# Altium PCB roneCPUBoard-v11.PcbDoc (part 2 of 3)
Units mil, origin at the board's own origin, x right, y up, seen from the top; angles counter-clockwise.
Board outline 3915.41 x 3915.49 mil, 2 copper layers (Top Layer, Bottom Layer); 202 components, 158 nets, 750 pads, 439 vias.
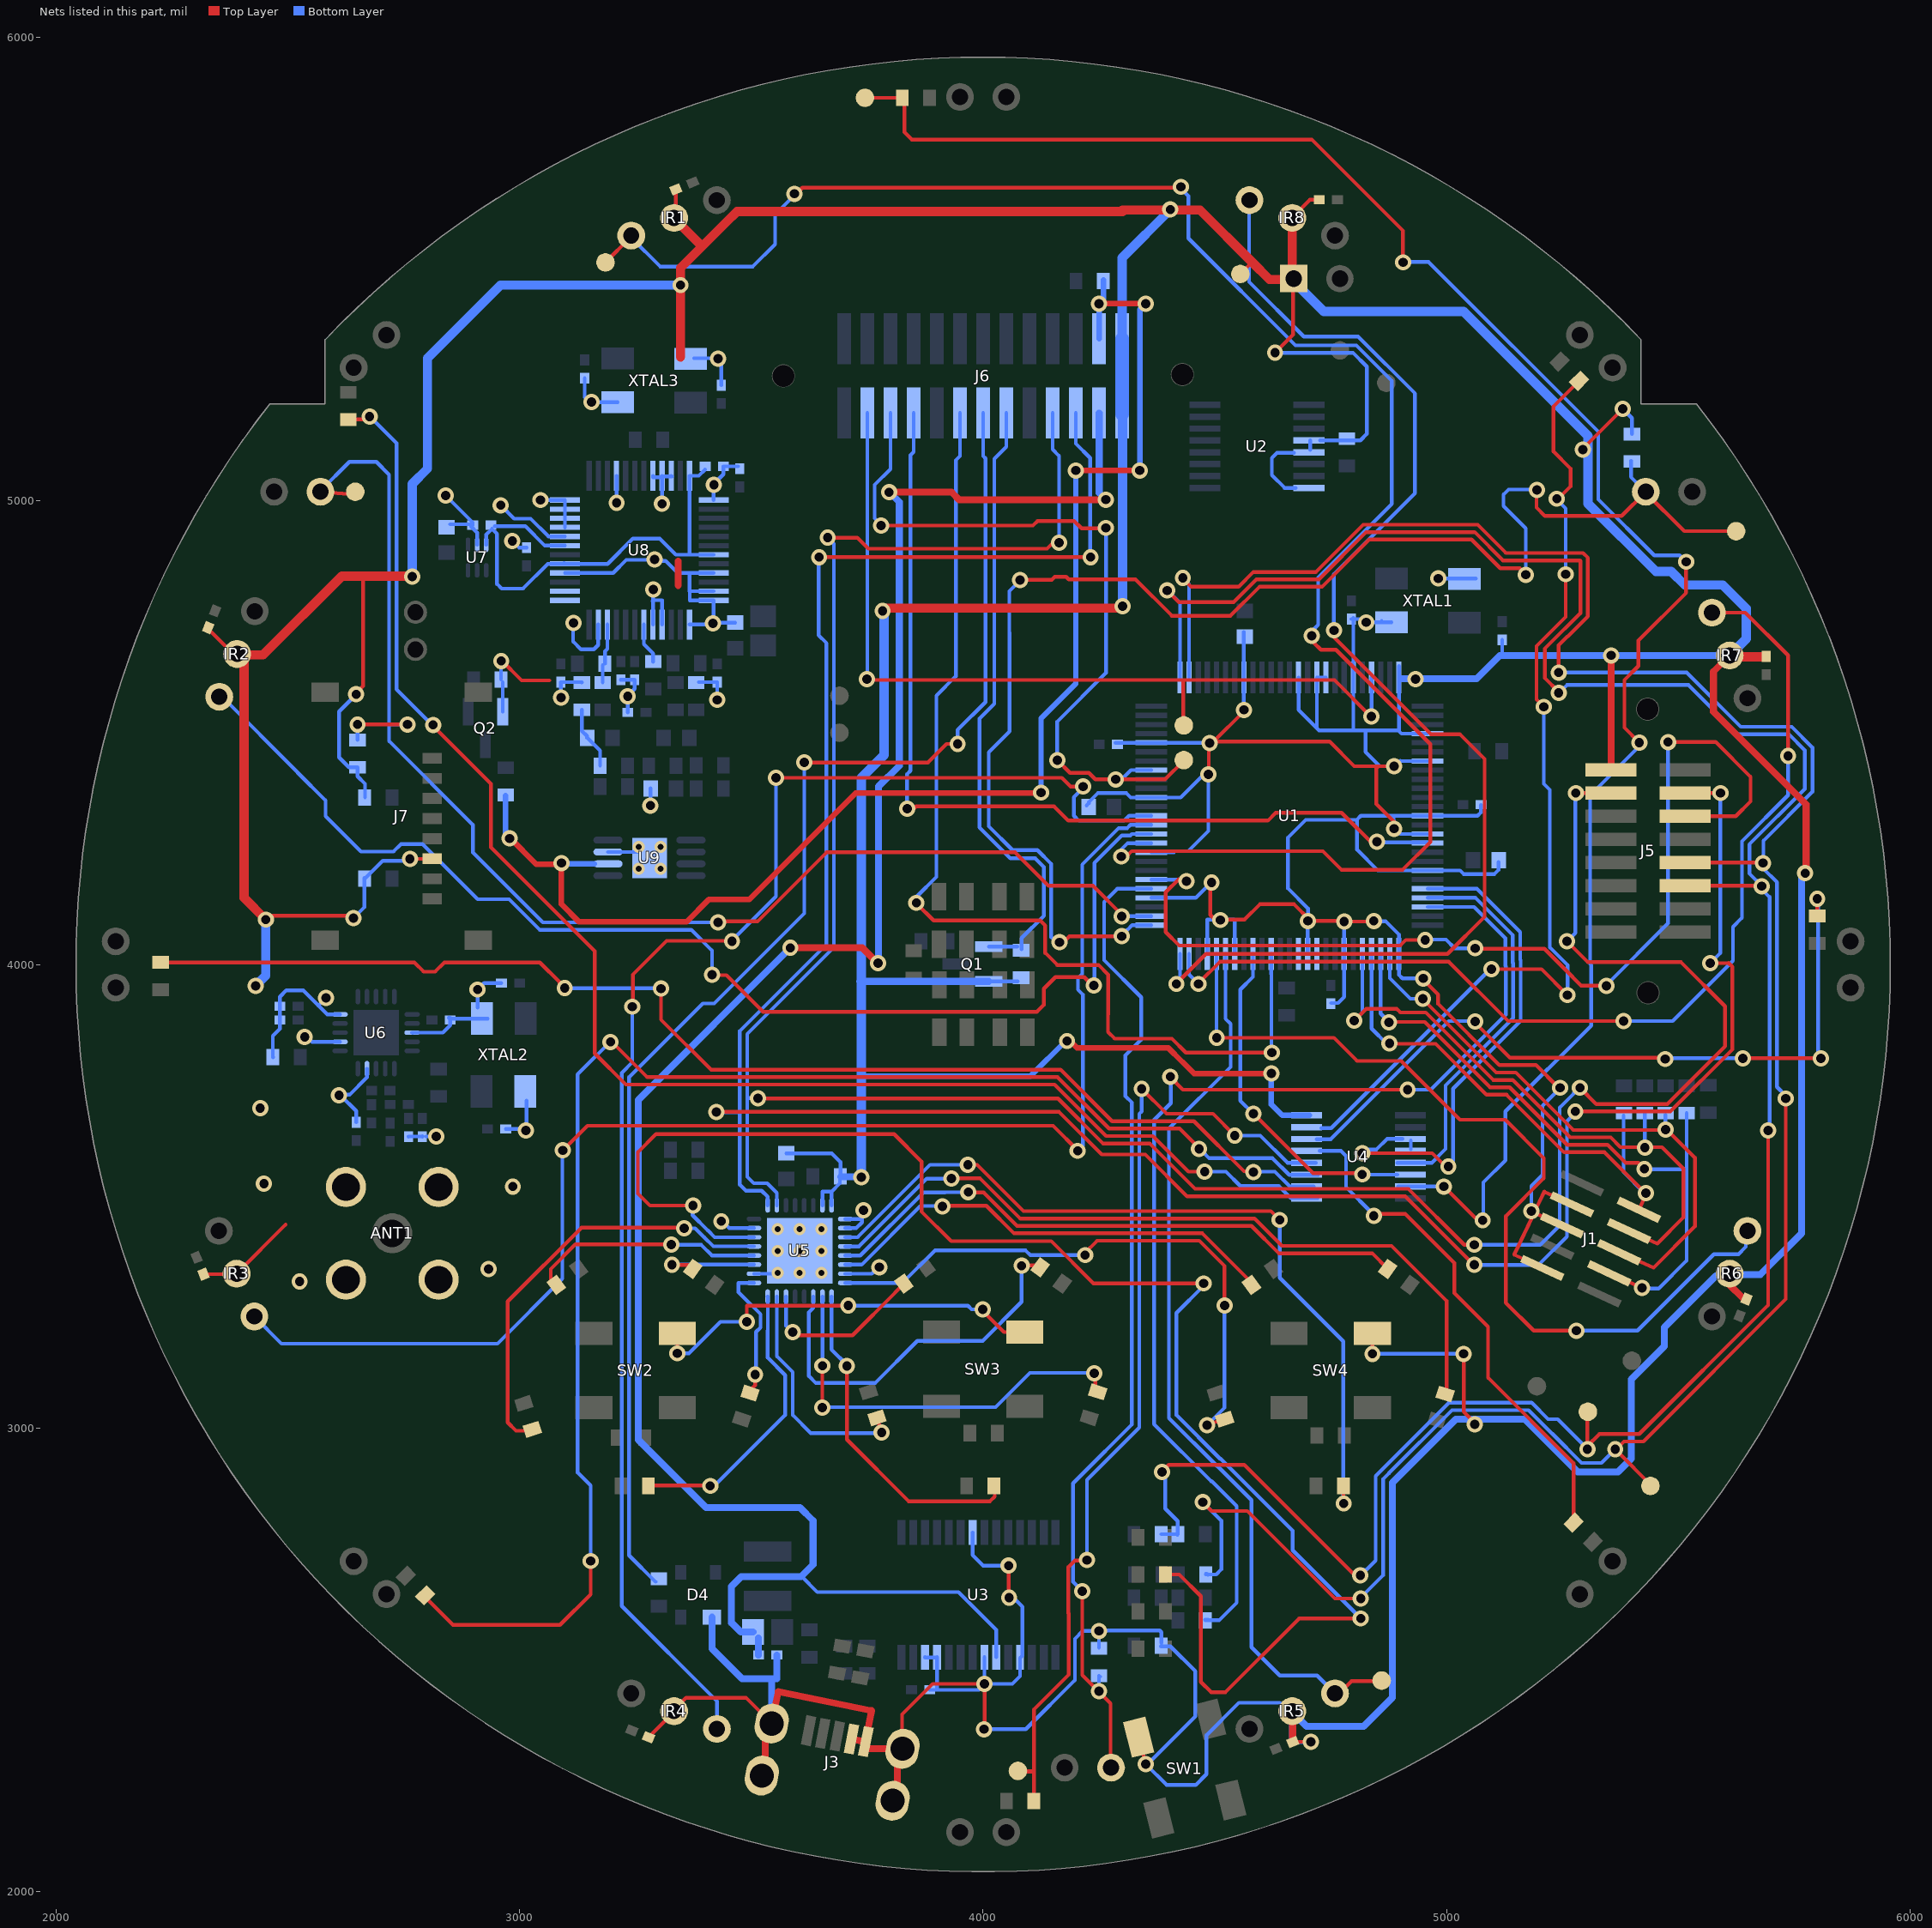
[diagram p2: the nets of this part, all layers, seen from the top]

## Via types
v1: diameter 35, hole 20, Top Layer to Bottom Layer, 418 vias
v2: diameter 25.98, hole 12.99, Top Layer to Bottom Layer, tented top, 17 vias
v3: diameter 149, hole 129, Top Layer to Bottom Layer, 2 vias
v4: diameter 260, hole 129, Top Layer to Bottom Layer, 2 vias

## Nets (pads, with @x,y where several pads share a name; then routed paths per layer and width w, separated by ;. In a path a pad name is that pad's centre, name@x,y a point inside that pad or via, vN(x,y) a via of type N, cw(c..) or ccw(c..) an arc to the next point about the centre after c; other vN are vias at no path point) (continued)
5V_BOOST: J6.23 R12.1 R56.2 U9.6 | length 3016.1
  Top Layer w12: v1@2978,4274 3036,4216 3090,4216 3090,4130 3128,4092 3359.7,4092 3407.7,4140 3495,4140 3725,4370 v1@4135,4370 ; v1(4200,5066) v1(4338,5066) ; v1(4250,5426) v1(4351,5426)
  Bottom Layer w12: R56.2@2969,4364 2969,4281 v1(2978,4272) ; v1@3090,4216 3089,4217 U9.6@3160.51,4217 ; v1@4125,4383 4125,4531 4200,4606 v1(4200,5066) ; J6.23@4250,5350.02 v1(4250,5426) 4260,5436 R12.1@4260,5477 ; v1(4338,5066) 4338,5413 v1(4351,5426)
  other v1: 3090,4219 4125,4371
5VUSB: C9.2 J6.24 L1.2 U3.20 | length 4554.1
  Top Layer w15: v1@3575,4036 3739,4036 v1@3772,4003 ; v1(3797,5019) 3932,5019 3948.5,5002.5 v1@4255,5002.5
  Bottom Layer w8: 3607,2681 3608,2680 3642,2646 3947,2646 4028.39,2564.61 U3.20@4028.39,2505.55
  Bottom Layer w15: 3457,2579 3457,2580 ; L1.2@3503.5,2560 3477,2560 3457,2580 ; C9.2@3515.31,2510 L1.2@3515.31,2546.69 ; v1@3574,4037 3575,4036 v1(3584,4036) 3256,3708 3256,2974.33 3402.33,2828 3605,2828 3633,2800 3633,2705 3608,2680 3607,2679 3478,2679 3457,2658 3457,2580 ; v1@3774,4002 3774,4384 3819,4429 3819,4998 v1@3797,5020 ; J6.24@4250,5189.98 4250.5,5189.48 4250.5,5017.5 v1@4260,5008
  other v1: 3773,4003 4265,5003
ADC_EXPAND: J5.11 U1.6 | length 2206.7
  Top Layer w8: 4421.91,4184 4394,4156.09 4394,4070 4423,4041 4900,4041 4912,4053 4953,4053 4954,4054 v1(4954,4053) ; v1@5064,4034 5211.37,4034 5272.37,3973 5272.37,3972.63 5290.5,3954.5 v1@5345,3954.5 ; v1(5478,4480) 5580.9,4480 5656,4404.9 5656,4352 5624,4320 J5.11@5515.02,4320
  Bottom Layer w8: U1.6@4362.77,4183.2 v1@4433.2,4183.2 ; v1@4433.41,4183 v1@4440,4183 ; v1@4956,4054 4999,4054 5018,4035 v1(5062,4035) ; v1@5344,3954 5344,3955 5478,4089 v1(5478,4480)
  other v1: 5345,3954 4439,4180
CHRG: J6.14 R17.1 | length 3054.5
  Top Layer w8: v1@3612,4436 3881,4436 3921,4476 v1(3945,4476)
  Bottom Layer w8: R17.1@3293,2668 3236,2725 3236,3757 3395,3916 3419.63,3916 3614,4110.37 3614,4435 v1@3615,4436 ; v1@3945,4475 3945,4506.25 4005,4566.25 4005,5092 4000,5097 J6.14@4000,5189.98
  other v1: 3614,4436
CHRGEN: J6.12 U1.90 | length 2321
  Top Layer w8: v1@3851,4130 3858,4130 3893,4095 4123,4095 4134,4084 4134,4025 4160,3999 4249,3999 4270,3978 4270,3892.72 4269.5,3892.22 4269.5,3854.5 4284,3840 4407.28,3840 4437.28,3810 v1(4623,3810)
  Bottom Layer w8: v1@3857,4133 3857,4147 3899,4189 3899,4580 3941,4622 3941,5088 3950,5097 J6.12@3950,5189.98 ; U1.90@4621.63,4022.77 4621.63,3979.62 4622,3979.25 4622,3811 v1(4623,3810)
  other v1: 3856,4133
CVDD: C31.2 C32.2 U7.3 U8.5 U8.7 U8.24 U8.31 | length 1072.9
  Bottom Layer w8: U7.3@2927.69,4905.56 2927.69,4927.69 2940,4940 2951,4929 2951,4821 2961,4811 3007,4811 3060.47,4864.47 U8.5@3097.57,4864.47 ; C32.2@2946,4946 3012,4946 3054.16,4903.84 U8.7@3097.57,4903.84 ; U8.5@3095.79,4866.25 U8.5@3097.57,4864.47 ; 3366.27,4886.27 U8.24@3366.27,5054.43 3386.43,5054.43 C31.2@3400,5068 ; U8.31@3418.43,4884.16 3336.84,4884.16 3302,4919 3244,4919 3189.47,4864.47 U8.5@3097.57,4864.47
DREQ: U8.8 | length 166.5
  Bottom Layer w8: v1(2959,4991) 2988,4962 3023.62,4962 3062.09,4923.53 U8.8@3097.57,4923.53
FTDI_RX: D31.2 J5.5 R61.2 TP6.1 U1.26 | length 5677.2
  Top Layer w8: v1@4386,2899 4386,2906 4400.5,2920.5 4563.5,2920.5 4802,2682 v1(4814,2682) ; v1(4397,4807) 4422,4782 4540.75,4782 4589.75,4831 4724.75,4831 4826.75,4933 5060.63,4933 5121.63,4872 5287.86,4872 ; v1@5242,4588.28 5212,4618.28 5212,4681.63 5254.38,4724.01 ; 5254.87,4724.01 5289,4758.14 5289,4870.86 ; v1(5304,2954) v1@5304,2961 ; TP6.1@5304,3041 v1@5304,2961 ; J5.5@5515.02,4170 v1@5680,4170 ; v1(5694,3642) 5694,3265 5416,2987 5330,2987 v1@5304,2961
  Bottom Layer w8: D31.2@4384.53,2771 R61.2@4416,2771 ; v1(4386,2905) 4386,2899 4393,2899 4393,2826 4420,2799 R61.2@4420,2771 ; v1@4398,4807 4424.78,4780.22 U1.26@4424.78,4619.23 ; R61.2@4419,2770 R61.2@4419.24,2769.76 ; v1(4814,2682) 4802,2682 4814,2694 4827,2694 4847,2714 4847,2896.2 4859,2908.2 4859,2908.37 5005.13,3054.5 5183.7,3054.5 5219.2,3019 5240,3019 5304,2955 v1(5304,2954) ; v1@5243,4586 5260,4603 5522.37,4603 5628.37,4497 5738.26,4497 5773,4462.26 5773,4378.63 5653.5,4259.13 5653.5,4196.5 v1@5680.5,4169.5 ; v1@5680,4162.72 5697,4145.72 v1@5697,3642
  other v1: 5680,4169 5242,4586
FTDI_TX: D30.1 J5.7 TP7.1 U1.27 | length 5641.1
  Top Layer w8: v1@4431,4833 4449,4815 4551.12,4815 4583.12,4847 4718.12,4847 4820.12,4949 5067.25,4949 5128.25,4888 5294.49,4888 5305,4877.49 5305,4751.51 5261.5,4708.01 5261.01,4708.01 5242,4689 v1(5242,4630) ; v1(4474,2840) 4493,2821 4570,2821 4759,2632 v1@4809,2632 ; v1(5364,2954) v1@5365,2953 ; TP7.1@5446,2872 v1@5365,2953 ; J5.7@5515.02,4220 5682,4220 v1(5683,4219) ; v1(5732,3711) 5732,3278 5425,2971 5383,2971 v1@5365,2953
  Bottom Layer w8: v1(4431,4834) 4444.46,4820.54 U1.27@4444.46,4619.23 ; v1(4474,2840) 4514,2800 4514,2695 4503,2684 D30.1@4484,2684 ; D30.1@4480.53,2685 D30.1@4480.53,2684 D30.1@4484,2684 ; D30.1@4483,2685 D30.1@4484,2684 ; D30.1@4485,2683 D30.1@4484,2684 ; v1@4813,2632 4863,2682 4863,2889.58 4875,2901.58 4875,2901.75 5011.75,3038.5 5177.08,3038.5 5227.58,2988 5228,2988 5291.5,2924.5 5334.5,2924.5 v1(5364,2954) ; v1(5242,4630) 5518,4630 5635,4513 5744.89,4513 5790,4467.89 5790,4373 5684,4267 v1@5684,4219 ; v1(5683,4219) 5683,4207.72 5713,4177.72 5713,3736 5732,3717 v1(5732,3711)
  other v1: 4815,2632
GBUF: R47.1 U8.42 | length 88.4
  Bottom Layer w8: U8.42@3267.84,4733.57 3267.84,4691.16 3288,4671 R47.1@3288,4653.53
GND: ANT1.2 ANT1.3 ANT1.4 ANT1.5 C1.1 C2.1 C3.1 C4.1 C5.1 C6.1 C7.1 C8.1 C9.1 C10.1 C11.1 C12.1 C13.1 C14.1 C15.1 C16.1 C17.1 C18.1 C19.1 C21.1 C23.1 C24.1 C25.1 C26.1 C27.1 C28.1 C29.1 C30.2 C31.1 C32.1 C33.2 C34.1 C36.1 C37.1 C38.2 C39.2 C40.2 C41.2 C42.1 C43.2 C46.1 D4.1 IR1.2 IR2.2 IR3.2 IR4.2 IR5.2 IR6.2 IR7.2 IR8.2 J1.3 J1.5 J1.9 J3.4 J3.5 J3.6 J3.7 J3.8 J3.9 J4.1 J5.16 J6.25 J6.26 J7.6 Q1.2 Q2.2 R2.1 R3.1 R10.1 R18.1 R32.1 R33.1 R39.2 R40.2 R41.2 R43.1 R54.1 R55.1 R57.1 SW1.2 SW2.2 SW3.2 SW4.2 TP1.1 U1.4 U1.9 U1.15 U1.21 U1.33 U1.39 U1.41 U1.42 U1.45 U1.50 U1.54 U1.57 U1.63 U1.65 U1.69 U1.76 U1.82 U1.85 U1.86 U1.87 U1.94 U1.97 U2.4 U2.5 U2.8 U3.7 U3.18 U3.21 U3.25 U3.26 U4.8 U5.1 U5.2 U5.7 U5.18 U5.23 U5.31 U5.32 U5.33 U6.8 U6.14 U6.17 U6.20 U7.2 U8.4 U8.9 U8.10 U8.11 U8.12 U8.16 U8.20 U8.21 U8.22 U8.25 U8.33 U8.35 U8.36 U8.37 U8.40 U8.41 U8.47 U9.7 U9.9 XTAL1.2 XTAL1.4 XTAL2.2 XTAL2.4 XTAL3.2 XTAL3.4 | length 32765.1
  Top Layer w8: C13.1@2317.53,3331.81 IR3.2@2385.81,3331.81 ; C12.1@2327.47,4724.53 2382,4670 2385.27,4670.73 2389,4667 2389.5,4668.5 IR2.2@2390,4670 ; IR3.2@2389,3333 2495,3439 ; v1@2459,4105 v1@2640,4105 ; v1(2641,4100) v1@2642,4099 ; v1@2646,4585 2662,4601 2662,4838 2662,4840 ; v1(2647,4583) v1@2655,4591 ; v1(2763,4228) J7.6@2815,4228 ; v1@2960,4661 2960,4657 3004,4613 3064,4613 ; C14.1@3278.19,2332.47 IR4.2@3330,2384.28 ; IR4.2@3331,2390 3359,2418 3488.07,2418 J3.6@3543.89,2362.17 ; IR1.2@3336.81,5613.81 C11.1@3336.81,5672.47 ; v1(3340,3161) SW2.2@3340,3198 ; v1@3432.28,3451 3437.28,3446 v1(3435,3446) ; v1(3490,3229) 3481,3229 3490,3238 3490,3264 v1(3709,3264) ; J3.4@3715.93,2329.04 J3.4@3715.93,2347 ; J3.9@3825,2314 3825,2382 3891,2448 v1(4003,2448) ; v1@3995,3257 4045,3207 SW3.2@4090,3207 SW3.2@4092,3207 ; v1(4002,2350) 4003,2350 v1@4003,2445 ; v1(4055,2703) 4055,2635 v1(4056,2634) ; SW1.2@4335.6,2332.97 v1(4351,2275) ; v1@4487,4406 v1@4487,4480 ; v1@4488,4478 v1(4489,4478) 4494,4478 v1@4497,4481 ; v1(4493,4177) 4492,4177 4490,4175 4490,4107 v1@4503,4094 ; v1(4512,4096) 4513,4097 4564,4097 4597,4130 4671,4130 v1@4705,4096 ; TP1.1@4555,5490 4580.5,5515.5 4581,5516 ; v1(4562.57,4549.43) 4562.57,4546.57 v1@4497,4481 ; v1(4630,5320) 4669,5359 4669,5479 J4.1@4669,5481 ; C15.1@4662,2323 v1(4707,2323) ; IR8.2@4667,5612 4705,5650 C17.1@4725.32,5650 ; v1@4702,4094 4778,4094 v1(4779.11,4092.89) v1@4844.11,4092.89 ; v1(4840,3160) SW4.2@4840,3204 ; v1@4887,4298 4887,4308 4848.5,4346.5 4848.5,4423.5 4853,4428 ; v1@4887,4422 v1(4887,4428) 4853,4428 ; v1(4950,3970) 4947,3970 4982,3935 4982,3914.88 5113.88,3783 5193,3783 5242,3734 v1(5245,3734) v1@5246.36,3734 ; v1(5037,3160) 5037,3035 v1@5061,3011 ; v1(5183,3468) 5183,3473 v1@5189.98,3466.02 ; v1@5190,3464 J1.5@5249.27,3436.78 ; v1@5191,3465 v1@5189.98,3466.02 ; J1.9@5206.68,3345.44 5206.29,3345.62 5146,3374 5189.2,3464.38 5189.45,3464.92 v1@5189.98,3466.02 ; J1.3@5270.57,3482.46 5211,3510 v1@5189.98,3466.02 ; v1(5294,5111) 5293,5112 v1(5380,5199) ; v1@4497,4481 4747.72,4481 4800.72,4428 4853,4428
  Top Layer w12: v1@4188,3835 4202.5,3820.5 4399.2,3820.5 4429.2,3790.5 4429.5,3790.5 4455,3765 v1(4622,3765)
  Top Layer w15: 3342,4818 3342,4870 ; J3.7@3522.3,2250.06 J3.7@3523,2250.06 ; J3.6@3523,2341.28 3530,2348.28 3530,2239 J3.7@3533.5,2235.5 ; J3.6@3545,2369 3558,2431 3759,2390 J3.5@3746.86,2328.09 ; J3.4@3715.93,2329.04 J3.5@3744,2323 ; J3.5@3746.75,2322.51 J3.5@3746.86,2323.09 3746.86,2307.83 J3.9@3815,2307.83 ; J3.8@3805,2195.71 J3.8@3804.52,2195.71 3815,2206.2 J3.9@3815,2307.83 ; J3.9@3826.11,2307.83 J3.9@3815,2307.83 ; 4301,5625 4301,5628 ; C15.1@4668,2329 IR5.2@4668,2390 ; J5.16@5354.98,4420 v1(5355,4667) ; IR7.2@5608,4664 5576,4632 5576,4545.53 5776,4345.53 v1@5776,4191 ; IR6.2@5611,3333 5611,3309 5639,3281 C16.1@5646,3281
  Top Layer w20: IR2.2@2391,4668 2446,4668 2616,4838 2662,4838 v1@2768,4838 ; IR2.2@2405,4668 2405,4144 v1(2452,4097) ; IR1.2@3333,5610 3390,5553 ; 3347,5311 v1(3347,5466) 3347,5503 3445.27,5601.27 3469,5625 4301,5625 ; v1(3783,4763) 3789,4769 4291,4769 v1@4300,4778 ; 4301,5628 4468,5628 4580.5,5515.5 4618,5478 J4.1@4667,5478 ; IR8.2@4655,5611 IR8.2@4667,5611 J4.1@4667,5478 ; J4.1@4670,5480 4669,5479 4667,5477 J4.1@4667,5478 ; IR7.2@5608,4664 C18.1@5682,4664
  Bottom Layer w8: IR3.2@2385.81,3331.81 2386.59,3332.1 IR3.2@2389,3333 ; R43.1@2467.47,3800 2467,3803 2467,3846 2482.31,3861.31 C28.1@2482.31,3880 C21.1@2482.31,3910 2482.31,3930.31 2496,3944 2533,3944 2566,3911 ; v1(2536,3844) 2539,3846 2551.68,3833.32 U6.17@2612.24,3833.32 ; v1(2582,3928) 2566,3912 2566,3911 ; v1(2610,3718) 2626,3718 2627,3719 2632.69,3719 2670.31,3756.62 U6.14@2670.31,3775.24 ; U6.20@2612.24,3892.37 2584.63,3892.37 2566,3911 ; v1@2614,3717 2647,3684 C23.1@2647,3659.69 ; v1(2641,4100) 2665,4124 R2.1@2665,4187 ; v1(2647,4583) 2610,4546 2610,4447 2631.53,4425.47 R39.2@2650,4425.47 2650,4406 2666,4390 R3.1@2666,4361 ; R2.1@2665.47,4185 2704.47,4224 2756,4224 v1@2760,4228 ; C24.1@2760,3628.32 2760,3629 2789,3629 2790,3630 C25.1@2790,3628.32 ; U6.8@2768.76,3852 U6.8@2767.76,3853 2834,3853 2850,3869 C29.1@2850,3885 ; C25.1@2798,3629 v1(2820,3629) ; v1(2840,5012) 2898.32,4953.68 C32.1@2898.32,4948.68 ; C29.1@2846.68,3885 2851.68,3883 XTAL2.4@2931,3883 ; C30.2@2850,4950 2897,4950 C32.1@2898.32,4948.68 ; U7.2@2908,4905.56 2908,4932 2895.16,4944.84 C32.1@2898.32,4948 C32.1@2898.32,4948.68 ; XTAL2.4@2909,3907 v1(2909,3946) 2923,3960 C26.1@2960.31,3960 ; R57.1@2959.53,4615 v1@2959.53,4650.53 ; Q2.2@2963.4,4545.43 R57.1@2963.4,4608.6 ; C27.1@2969.68,3645 v1@3008,3645 ; v1(2984,4914) 2998.31,4899.69 C37.1@3015,4899.69 ; v1@3014.74,3654.74 XTAL2.2@3014.74,3706.26 ; v1(3044.73,5002.27) U8.12@3097.57,5002.27 U8.9@3097.57,4943.21 ; v1(3089,4576) C38.2@3089,4609.31 3132.69,4609.31 R54.1@3134,4608.53 ; U8.4@3097.57,4844.79 3201.79,4844.79 3230,4873 3289,4873 v1(3291,4874) 3292.5,4871 3314.72,4871 3340.72,4845 3366.27,4845 3366.27,4844.79 ; v1@3115,4738 3115,4697 3132,4680 3160,4680 3169.42,4689.42 U8.47@3169.42,4733.57 ; C43.2@3140,5265.31 3140,5224 3147,5217 v1@3155,5217 ; v1@3155.74,5213.26 XTAL3.2@3211.26,5213.26 ; U9.7@3190.43,4242.8 U9.9@3254,4242.8 ; U8.16@3208.79,5054.43 3208.79,4999.21 3209,4999 v1(3209,4996) ; C42.1@3218,4614.32 C34.1@3246.69,4614.32 ; C40.2@3233.31,4544 3233.31,4573.69 v1(3233,4579) 3233,4580 3248,4595 C34.1@3248,4614.32 ; v1@3279,4342 v1@3282,4345 ; v1@3282,4346 v1@3282,4345 ; C46.1@3282.44,4380 3282.44,4345.44 v1@3282,4345 ; U8.41@3287.53,4733.57 3287.53,4783.73 ; U8.20@3287.53,5054.43 3288,5051 3307,5051 3307,5054.43 U8.21@3307.21,5054.43 ; v1(3288,4809) 3287.53,4804.47 3287.53,4789 3287,4783.73 3287.53,4783.73 ; v1(3307,4994) 3307.21,4994 U8.21@3307.21,5054.43 ; U8.40@3307.21,4733.57 3307.21,4785.79 3307,4786 3287.53,4786 3287.53,4783.73 ; U8.22@3326.9,5054.43 3328.68,5053 3308.65,5053 U8.21@3307.21,5054.43 ; v1@3342,3161 3365,3161 3433,3229 v1(3490,3229) ; U8.37@3366.27,4733.57 3415.57,4733.57 3418,4737 3418,4737.56 C33.2@3465,4737.56 ; XTAL3.4@3376,5308 3428,5308 3428,5301 3435,5294 C41.2@3435,5249.69 ; R55.1@3386.31,4609.31 C39.2@3426,4609.31 v1(3426,4571) ; v1(3417,4736.13) 3418.43,4737.57 U8.36@3418.43,4785.73 3366.73,4785.73 3366.73,4805.42 ; U8.35@3418.43,4805.42 3366.73,4805.42 ; U8.33@3418.43,4844.79 3366.27,4844.79 ; U8.25@3418.43,5002.27 3418.43,5028.43 v1(3419,5035) 3419,5037 3439.69,5057.69 C31.1@3439.69,5075 C36.1@3471,5075 ; v1(3435,3446) 3437.28,3446 3452.07,3431.21 U5.23@3505.57,3431.21 ; U5.18@3505.57,3332.79 U5.33@3555.79,3332.79 ; C19.1@3575,3592.56 3673.44,3592.56 3692,3574 R33.1@3692,3547 ; U5.31@3653.21,3480.43 3653.21,3510.21 3673.21,3510.21 ; U5.32@3673,3480.43 3673,3510 3673.21,3510.21 ; 3673.79,3510.21 3673.21,3510.21 ; R33.1@3691,3543 3691,3528 3673.21,3510.21 ; U5.7@3702.43,3332.79 3759.79,3332.79 3774,3347 v1(3776,3347) ; U5.2@3702.43,3431.21 3726.07,3431.21 3738.43,3443.57 3738.43,3467.43 v1@3744,3473 ; U5.1@3702.43,3450.9 3737.9,3450.9 ; v1(3709,3264) 3967,3264 3975,3256 v1(3999,3256) ; U3.26@3874.84,2505.55 3874.84,2505 U3.25@3900.43,2505 ; C10.1@3884.69,2435 3991,2435 4004,2448 4063,2448 4079.57,2464.57 4079.57,2503.57 4084.5,2508.5 4084.5,2537.49 4085,2537.99 4085,2614 4068,2631 4061,2631 4058,2634 v1(4056,2634) ; U3.25@3900.43,2505.55 U3.25@3900.43,2505 ; 3901,2435 3900.43,2435.57 U3.25@3900.43,2505 ; U3.7@3977.2,2774.45 3977.2,2725.8 4000,2703 v1(4055,2703) ; v1(4002,2350) 4092,2350 4198,2456 4198,2545 4215,2562 v1(4250,2562) ; v1@4002.8,2435 U3.21@4002.8,2505.55 ; Q1.2@4012.43,3963.6 R32.1@4074.6,3963.6 ; C7.1@4223,4343 4228,4348 4228,4350.28 4247.44,4369.72 4309.28,4369.72 4318.63,4360.37 4426.37,4360.37 4474,4408 v1@4484,4408 ; R41.2@4250,2526 v1(4250,2562) ; C1.1@4285.52,4478.48 4446.52,4478.48 ; U1.4@4362.77,4143.83 4451.17,4143.83 ; U1.9@4362.77,4242.26 4412.01,4242.26 ; R18.1@4384,2529 4404,2529 4458,2475 4458,2378 4355,2275 v1(4351,2275) 4396,2230 4459,2230 4482,2253 4482,2337 4552,2407 4640,2407 4658,2389 IR5.2@4667,2389 4667.93,2388.36 4668.19,2388.19 IR5.2@4668.19,2385.81 ; R18.1@4384.53,2536.47 4384.53,2559.47 4381,2563 4250,2563 v1(4250,2562) ; 4414.25,4244.5 4442.5,4244.5 4486,4288 v1@4486,4408 ; 4447,4478 v1(4489,4478) ; 4453,4144 4459,4144 4492,4177 v1(4493,4177) ; U1.97@4483.83,4022.77 4483.83,4097 v1@4513,4097 ; v1(4512,4096) v1@4513,4097 ; U1.94@4542.89,4022.77 4542.89,4096.11 4542,4097 v1@4513,4097 ; v1(4562.57,4549.43) C3.1@4562.57,4717.57 ; v1(4630,5320) 4798,5320 4828,5290 4828,5252.47 ; IR8.2@4667,5611 IR8.2@4667,5612 ; 4671,2323 4668.19,2322.53 4707.47,2322.53 v1(4707,2323) ; U2.5@4671,5104 4634,5104 4623,5093 4623,5056 4650.57,5028.43 U2.8@4674.66,5028.43 ; U1.87@4680.69,4022.77 U1.86@4700.37,4022.77 ; 4680.69,4549.31 4725,4505 4798.8,4505 ; 4680.69,4551.06 U1.39@4680.69,4619.23 ; v1@4700,4093 v1(4701,4094) 4701,4121 4658,4164 4658,4274 4696,4312 4807,4312 ; v1@4700.37,4090.37 U1.86@4700.37,4022.77 ; U2.5@4706,5110.68 U2.4@4706,5130.8 ; U1.85@4720.06,4022.77 U1.86@4700.37,4022.77 ; 4720.06,4510.06 U1.41@4720.06,4619.23 ; U1.41@4721.77,4619.23 U1.42@4739.74,4619.23 ; U2.4@4727.2,5130.8 4727.41,5131 4814,5131 4828,5145 4828,5250 ; C2.1@4751,3917 4766,3917 4779.11,3930.11 v1(4779.11,4092.89) ; C5.1@4795,4745.31 4818.69,4745.31 v1@4826,4738 ; C5.1@4798.8,4748 4798.8,4505 ; v1(4826.74,4738.26) XTAL1.4@4881.26,4738.26 ; v1(4840,3160) v1(5037,3160) ; v1@4843,4093 4869,4093 4897.22,4064.78 4897.22,3977.78 4905,3970 v1(4950,3970) ; XTAL1.4@4860,4739 XTAL1.4@4860,4741 ; 4886,4321 4886,4310 v1@4887,4309 ; 4897,4507 4897,4505 ; 4897.22,4505 U1.50@4897.22,4644 ; v1@4900,4281.63 U1.65@4959.23,4281.63 ; 4900.5,4439.5 v1@4900.11,4439.11 ; v1(4933,4616) v1@4933,4617 ; U1.57@4959.23,4439.11 v1@4900.11,4439.11 ; U1.54@4959.23,4498.17 4902.83,4498.17 4897,4504 4897,4505 ; v1(4982,4833) XTAL1.2@5063,4833 ; C8.1@5074,4344 5074,4328 5067,4321 U1.63@4959.23,4321 4815,4321 4807,4313 4807,4247.63 4851.74,4202.89 5029.11,4202.89 5036.72,4195.28 5103.28,4195.28 5112,4204 C4.1@5112,4221 ; 5120,4670 C6.1@5120,4700.31 ; v1(5183,3468) 5183,3522 5207,3546 5207,3695 5245,3733 v1(5245,3734) ; v1(5380,5199) 5400,5179 R40.2@5400,5144.53 ; IR6.2@5611,3333 IR6.2@5613,3331 ; 3366.27,4844.79 3366.27,4805.42 3366.73,4805.42 ; 4798.8,4505 4825,4505 ; 4825,4505 4897,4505 ; 4825,4505 4825,4459 4856,4428 4883,4428 4886,4425 v1(4887,4428) v1@4900.11,4439.11
  Bottom Layer w12: 3735,3759 3737,3759 4102,3759 v1@4180,3837 ; v1@4622,3764 4622,3698 4645.43,3674.57 U4.8@4704,3674.57
  Bottom Layer w15: D4.1@3415,2591.77 3415,2524 3480,2459 3554.68,2459 C9.1@3554.68,2510 ; J3.6@3543.89,2362.17 3543.89,2459 ; R33.1@3693,3542 3738,3542 v1(3737,3541) ; 3734,3963.6 3737,3963.6 Q1.2@4012.43,3963.6 ; IR5.2@4667,2387 4668.19,2385.81 4698,2356 4821,2356 4883,2418 4883,2882 5020,3019 5169,3019 5283,2905 5370,2905 5399,2934 5399,3105 5470,3176 5470,3217 5581,3328 5606,3328 IR6.2@5611,3333 ; 4668,2329 IR5.2@4668,2384 ; U1.50@4902,4617 4933,4617 5065,4617 5115,4667 v1(5355,4667) IR7.2@5611,4667 ; IR6.2@5610,3331 5613,3331 5677,3331 5766,3420 5766,4188 v1@5773,4195
  Bottom Layer w20: v1(2430,3954) 2452,3976 v1(2452,4097) ; v1@2768,4836 2768,5037 2801,5070 2801,5308.4 2958.6,5466 v1(3347,5466) ; v1(3737,3541) 3737,3759 3737,3963.6 3737,4403 3786,4452 v1@3786,4763 ; J6.26@4300,5189.98 4301,5188.98 v1@4301,4780 ; J6.25@4300,5350.02 4300,5525 v1(4404,5629) ; J4.1@4670,5480 4670,5474 4735,5409 5037,5409 5305.5,5140.5 5305.5,4994.5 5452,4848 5484.89,4848 5513.89,4819 5596,4819 5647,4768 5647,4703 IR7.2@5619,4675
  Bottom Layer w29.12: J6.26@4300,5187.98 J6.26@4300,5189.98 J6.25@4300,5350.02
  other v1: 5061,3008 2525,3316 2933,3343 3742,3470 2985,3521 2448,3527 3013,3642 2440,3690 4181,3835 4843,4094 5774,4197 4887,4293 3282,4343 4486,4410 2960,4655 3116,4737 4301,4773 2768,4837 3155,5214 3428,5307
  other v2: 3556.76,3334.76 3604,3334.76 3651.24,3334.76 3556.76,3382 3604,3382 3651.24,3382 3556.76,3429.24 3604,3429.24 3651.24,3429.24 3256.38,4206.38 3303.62,4206.38 3256.38,4253.62 3303.62,4253.62
I2C_SCL: J5.13 J6.22 U5.25 | length 5860.9
  Top Layer w8: v1(3424,3682) 4164,3682 4256,3590 4350,3590 4440,3500 4911,3500 v1@5062,3349 ; v1@3643.51,4874.49 3643.03,4879 v1@4230,4879 ; v1@5282.5,3687.5 v1(5278,3683) 5483,3683 5617,3817 5617,3995 5608.5,4003.5 ; J5.13@5515.02,4370 v1(5591,4370) ; v1(5569,4003) 5608,4003
  Bottom Layer w8: v1(3424,3682) 3425,3682 3425,3681 3475,3681 ; 3475,3559 3475,3560 ; U5.25@3535.1,3480.43 3535.1,3498.9 3522,3512 3488,3512 3475,3525 3475,3560 ; v1(3646,4879) 3645,4878 3645,4710.35 3662,4693.35 3662,4043.63 3475,3856.63 3475,3681 ; J6.22@4200,5189.98 4200,5124 4231,5093 4231,4880 4233,4878 v1@4231,4876 ; v1@4232,4877 v1(4232,4879) ; v1(5060,3352) 5199,3352 5260,3413 5260,3662 v1@5278,3680 ; v1(5569,4003) 5591,4025 v1(5591,4370) ; 3475,3560 3475,3681
I2C_SDA: J5.14 J6.20 U5.26 | length 5817.6
  Top Layer w8: v1@3514.5,3711 4161.49,3711 4258.49,3614 4359.37,3614 4457.37,3516 4917.63,3516 5038.31,3395.31 v1(5059.69,3395.31) ; v1@3667,4921 3728.37,4921 3752.37,4897 4138,4897 4152,4911 v1@4164,4911 ; v1(5260,4050) 5305,4005 5506,4005 5601,3910 5601,3823.63 5476.37,3699 5323,3699 v1(5288,3734) ; v1(5279,4370) J5.14@5354.98,4370
  Bottom Layer w8: v1@3513.5,3712 3491,3712 ; U5.26@3554.79,3480.43 3554.79,3507.22 3534,3528 3505,3528 3491,3542 3491,3712 ; 3678,4908 3678,4037 3491,3850 3491,3712 ; J6.20@4150,5189.98 4150,5111.35 4164,5097.35 v1@4164,4908 ; v1(5059.69,3395.31) 5202.31,3395.31 5244,3437 5244,3691.28 5274.5,3721.78 ; v1(5260,4050) 5278,4068 5278,4367 5276,4367 v1(5279,4370)
  other v1: 3514,3711.5 4164,4910 3664.5,4921.31
IR_EMIT_0: R24.2 TP10.1 U4.15 | length 4208.6
  Top Layer w8: TP10.1@3744,5870 TP10.1@3745,5870 R24.2@3825.47,5870 3830,5865.47 3830,5796 3846,5780 4709,5780 4906,5583 v1(4906,5515) ; v1(4994,3521) 5068,3447 v1@5079,3447 ; v1(5416,4479) 5384,4511 5384,4614 5414,4644 5414,4699 5517,4802 v1(5517,4869)
  Bottom Layer w8: U4.15@4895.76,3521 v1(4994,3521) ; v1(4906,5515) 4905,5516 4961.11,5516 5327.5,5149.61 5327.5,5003.61 5448.11,4883 5503,4883 v1(5517,4869) ; v1@5075.5,3447.5 5079.5,3447.5 5079.5,3529.9 5127,3577.4 5127,3683 5312,3868 5312,3999 5310,4001 5310,4365 5420,4475 v1(5416,4479)
  other v1: 5078,3448
IR_EMIT_1: R25.2 U4.1 | length 3328.6
  Top Layer w8: R25.2@2629,5176 2682.24,5176 v1(2676,5182.24) ; v1(2813,4517) 2813,4515 2938,4390 2938,4253 3162,4029 3162,3808 3229,3741 4154.12,3741 4265.12,3630 4366,3630 4443,3553 v1@4477,3553
  Bottom Layer w8: v1(2676,5182.24) v1@2677.76,5181.24 ; v1@2676,5183 v1@2677.76,5181.24 ; v1@2811.36,4516.36 2734,4593.72 2734,5125 v1@2677.76,5181.24 ; v1(4478,3553) 4524,3553 4555,3522 4638,3522 4664,3496 U4.1@4722,3496
IR_EMIT_2: R26.2 U4.2 | length 2731.3
  Top Layer w8: R26.2@2225,4004.53 2772.75,4004.53 2792.78,3984.5 2817.22,3984.5 2837.25,4004.53 3043.47,4004.53 3086,3962 v1@3086,3954 ; v1@3305,3938 3305,3881 3413,3773 4167.37,3773 4278.37,3662 4455,3662 4563,3554 4575,3554 v1@4582,3547
  Bottom Layer w8: v1@3096,3949 v1@3305,3949 ; v1@4582,3547 4588,3553 4629.63,3553 4661.63,3521 U4.2@4713,3521
  other v1: 4583,3552 3305,3948 3097,3949
IR_EMIT_3: R27.2 U4.3 | length 3286.1
  Top Layer w8: R27.2@2798,2633 2856,2575 3087,2575 3153,2641 v1(3153,2713) ; v1@3204,3828 3275,3757 4160.75,3757 4271.75,3646 4424,3646 4461,3609 4464,3609 v1@4464,3595
  Bottom Layer w8: v1(3153,2713) 3153,2876 3125,2904 3125,3763 v1@3203,3841 ; v1@4473,3597 4488,3582 4624.37,3582 4660.37,3546 U4.3@4723,3546
  other v1: 4466,3602 3196,3833
IR_EMIT_4: R28.2 TP11.1 U4.4 | length 2108.1
  Top Layer w8: R28.2@4109.53,2195 4110,2195 4110,2393 4184.5,2467.5 4184.5,2600.22 4184,2600.72 4184,2700 4198,2714 v1@4224,2714 ; v1(4342,3732) 4396,3678 4496,3678 v1(4543,3631)
  Top Layer w10: TP11.1@4086,2259 4109,2259
  Bottom Layer w8: v1@4227,2721 4224,2724 4224,2888 4337,3001 4337,3677.88 4342,3682.88 4342,3730 v1@4343,3731 ; v1(4543,3631) 4598,3631 4657,3572 U4.4@4718,3572
  other v1: 4224,2715
IR_EMIT_5: R29.2 U4.5 | length 1094.7
  Top Layer w8: v1@4843,3462 4911,3462 5017,3356 5017,3291 5089.5,3218.5 5089.5,3108.5 5274.12,2923.88 R29.2@5274.12,2795.88
  Bottom Layer w8: U4.5@4726.34,3597.8 4772.2,3597.8 4783,3587 4783,3520 v1@4841,3462
  other v1: 4843,3458
IR_EMIT_6: R30.2 U4.6 | length 1619.4
  Top Layer w8: v1@5061,3875 5137,3799 5469,3799 v1(5472,3796) ; v1@5639.36,3801.36 v1(5639.36,3797.64) v1(5807.64,3797.64) ; R30.2@5800,4103 R30.2@5800,4104.53 v1(5800,4142)
  Bottom Layer w8: U4.6@4720,3623 4750,3623 5005,3878 v1@5062,3878 ; v1@5470,3798 5639,3798 v1(5639.36,3797.64) ; v1(5800,4142) 5802,4140 5802,3803.28 v1(5807.64,3797.64)
  other v1: 5062,3877
IR_EMIT_7: R31.2 U4.7 | length 2129.5
  Top Layer w8: v1(5097,3990) 5205,3990 v1(5261,3934) ; v1(5210,4556) 5194,4572 5194,4687 5257,4750 v1(5257,4842) ; v1@5242.5,5006.5 5267.5,5031.5 5267.5,5070.22 5231,5106.72 5231,5204.24 R31.2@5285.88,5259.12
  Bottom Layer w8: U4.7@4730,3647 4751.37,3647 5093.87,3989.5 v1@5097.5,3989.5 ; v1(5210,4556) 5210,4390 5223,4377 5223,4037 5261,3999 v1(5261,3934) ; v1@5237,5004 5257,4984 v1(5257,4842)
  other v1: 5238,5005
IR_RECV_0: IR1.1 TP8.1 U1.10 | length 4059.1
  Top Layer w8: TP8.1@3185,5515 IR1.1@3238,5568 ; v1@3591,5662 3596,5662 3610,5676 v1@4434,5676 ; v1(4298,4233) 4309,4233 4320.5,4244.5 4733.22,4244.5 4773.22,4204.5 4905.5,4204.5 4965,4264 4965,4475.37 4761.37,4679 4729,4679 4714,4694 v1@4714,4712
  Bottom Layer w8: IR1.1@3240.61,5572.73 3240.61,5568.39 3303,5506 3503,5506 3551,5554 3551,5618 v1@3594.5,5661.5 ; v1@4298,4248 4311.94,4261.94 U1.10@4362.77,4261.94 ; v1@4425,5676 4443,5658 4443,5567 4674,5336 4805.37,5336 4882,5259.37 4882,4994 4723,4835 4723,4733 v1@4709,4719
  other v1: 4709,4709 3593,5663 4427,5678
IR_RECV_1: IR2.1 U1.11 | length 2701.5
  Top Layer w8: v1(3415,3978) 3416,3977 3446,3977 3525,3898 4116,3898 4131,3913 4131,3948 4156,3973 4218,3973 v1@4237.5,3953.5
  Bottom Layer w8: IR2.1@2356.73,4578.61 2522.34,4413 ; 2520.5,4414.5 2581,4354 2581,4320 2657.5,4243.5 2727.5,4243.5 2744,4260 2790,4260 2909,4141 2977.12,4141 3043.12,4075 3370,4075 3415,4030 v1(3415,3978) ; v1@4235,3958 4234,3959 4240,3965 4240,4219 4299.28,4278.28 4317.54,4278.28 4320.88,4281.63 U1.11@4362.77,4281.63
  other v1: 4239,3955
IR_RECV_2: IR3.1 U1.12 | length 3005.7
  Top Layer w8: v1@3091,3599 v1(3093,3599) 3146,3652 4151,3652 v1@4206,3597
  Bottom Layer w8: IR3.1@2427.27,3240.61 2485.88,3182 2952,3182 3092,3322 3092,3602 v1@3095,3605 ; v1(4204,3598) 4215,3609 4215,3935.28 4204.5,3945.78 4204.5,3970.22 4214,3979.72 4214,4215.63 4292.66,4294.28 4310.91,4294.28 4317.94,4301.31 U1.12@4362.77,4301.31
IR_RECV_3: IR4.1 U1.13 | length 3279.2
  Top Layer w8: v1@3244,3914 3244,3978 3317,4051 3458,4051 v1(3458,4050) ; v1(3553,4403) 4170,4403 4189,4384 4212,4384 4216,4380 v1(4216,4384)
  Bottom Layer w8: v1@3243,3912 3243,3789 3220,3766 3220,2616 3425.39,2410.61 IR4.1@3425.39,2350.73 ; v1@3457,4051 3553,4147 v1(3553,4403) ; v1@4214.5,4383.5 4214.5,4379.5 4196,4361 4196,4321 4206.72,4310.28 4304.28,4310.28 4315,4321 U1.13@4362.77,4321
  other v1: 3243,3909
IR_RECV_4: IR5.1 TP9.1 U1.95 | length 1965.2
  Top Layer w8: IR5.1@4759.39,2427.27 4768.27,2427.27 4795,2454 TP9.1@4862,2454
  Bottom Layer w8: U1.95@4523.2,4022.77 4523.2,3882.8 4534,3872 4534,3779 4401,3646 4401,3021.37 4504.87,2917.5 4506.1,2917.5 4579,2844.6 4579,2527 4640,2466 4720.66,2466 IR5.1@4759.39,2427.27
IR_RECV_5: IR6.1 U1.96 | length 1994.2
  Top Layer w8: v1(4504,3842) 4757,3842 4807,3792 4902,3792 5029,3665 5127,3665 5210,3582 5210,3539 5128,3457 5128,3270 5188,3210 v1(5280,3210)
  Bottom Layer w8: U1.96@4503.52,4022.77 4503.52,3842.48 v1(4504,3842) ; v1(5280,3210) 5412,3210 5577,3375 5630,3375 5646,3391 5646,3422.12 IR6.1@5649.27,3425.39
IR_RECV_6: IR7.1 U1.99 | length 2260.3
  Top Layer w8: v1(4465,3958) 4465,3960 4511,4006 5005,4006 5133,3878 5374,3878 v1@5382,3870 ; IR7.1@5572.73,4759.39 5644.61,4759.39 5737,4667 v1(5737,4450)
  Bottom Layer w8: U1.99@4444.46,4022.77 4444.46,3978.54 v1(4465,3958) ; v1@5390,3878 5488,3878 5618,4008 5618,4081.35 5637.5,4100.85 5637.5,4265.75 5737,4365.25 v1(5737,4450)
  other v1: 5382,3878
IR_RECV_7: IR8.1 U1.100 | length 2812.4
  Top Layer w8: v1@4416,3958 4481,4023 5002,4023 5082,4103 5082,4443.72 5028.72,4497 4966,4497 4758,4705 4758,4717 4762,4721 v1(4757,4721)
  Bottom Layer w8: v1@4417,3959 4424.78,3966.78 U1.100@4424.78,4022.77 ; IR8.1@4567.73,5649.27 IR8.1@4574.61,5649.27 4574,5648.66 4574,5473 4692,5355 4809,5355 4932,5232 4932,5017 4757,4842 v1@4757,4722
  other v1: 4417,3958
IR_XMIT_CLK: U1.71 U4.11 U4.12 | length 1124.9
  Top Layer w8: v1(4818,3593) 4969,3593 4999,3563 v1@5003,3563
  Bottom Layer w8: v1(4818,3593) 4818,3601 4849,3601 4872,3624 U4.11@4905,3624 ; U4.12@4923,3601.13 U4.11@4923,3620.32 ; U1.71@4959.23,4163.52 5065.48,4163.52 5159,4070 5159,4010.49 5160,4009.49 5160,3878.37 5014,3732.37 5014,3577 v1@5006,3569
  other v1: 5004,3564
IR_XMIT_DATA: U1.92 U4.14 | length 730.5
  Top Layer w8: v1@4583,3675 4587,3675 4712,3550 4815,3550 v1@4815,3540
  Bottom Layer w8: U1.92@4582.26,4022.77 4582.26,3973.26 4555,3946 4555,3706 v1(4583,3678) ; v1@4824.61,3546.61 U4.14@4893.66,3546.61
  other v1: 4818,3547
IR_XMIT_PWM: U1.72 U4.13 | length 856
  Bottom Layer w8: U4.13@4893.66,3572.2 4968.2,3572.2 4998,3602 4998,3739 5144,3885 5144,4002.86 5143,4003.86 5143,4063.37 5062.54,4143.83 U1.72@4959.23,4143.83
JTAG_TCK: J1.4 R5.1 U1.80 | length 1344.6
  Top Layer w8: v1(4801,3879) 4826.5,3904.5 4892.5,3904.5 4900.5,3896.5 4955.13,3896.5 5100.63,3751 5142.88,3751 5266.88,3627 5354.25,3627 5375.25,3606 5465,3606 5511,3560 5511,3454 5455,3398 J1.4@5394.03,3424.89
  Bottom Layer w8: v1(4801,3879) 4818.48,3896.48 U1.80@4818.48,4022.77 ; v1@5428,3601 R5.1@5428,3679.47
  other v1: 5428,3605
JTAG_TDI: J1.8 R7.1 U1.78 | length 1444.2
  Top Layer w8: v1@4876,3876 4953,3876 5094,3735 5136.25,3735 5260.25,3611 5347.63,3611 5386.63,3572 5414,3572 v1(5427,3559) ; J1.8@5351.43,3333.54 v1@5420,3303
  Bottom Layer w8: U1.78@4857.85,4022.77 4857.85,3894.15 v1@4876,3876 ; v1@5421,3301 5457.75,3301 5518,3361.25 R7.1@5518,3679.47 ; v1@5426,3559 5427,3558 5518,3558
  other v1: 5422,3302 4876,3875
JTAG_TDO: J1.6 R6.1 U1.77 | length 1283
  Top Layer w8: v1(4949,3926) 4949,3925.25 5107.25,3767 5149.51,3767 5273.51,3643 5465,3643 5472.5,3635.5 5473,3636 v1(5473,3644) ; J1.6@5372.73,3379.22 5447,3346 5536,3435 5536,3583 5483,3636 v1@5474,3636
  Bottom Layer w8: U1.77@4877.54,4022.77 4877.54,3970.46 4922,3926 v1(4949,3926) ; R6.1@5472.5,3675.5 5472.5,3635.5 5473,3636 v1(5473,3644)
JTAG_TMS: J1.2 R4.1 U1.79 | length 1123.9
  Top Layer w8: v1@4871,3829 4976.49,3829 5086.49,3719 5129.63,3719 5253.63,3595 5341,3595 v1@5429,3507 ; J1.2@5415.32,3470.56 v1@5430,3504
  Bottom Layer w8: U1.79@4838.17,4022.77 4838.17,3861.83 v1@4871,3829 ; R4.1@5382,3674 5382,3552 5427,3507 v1(5430,3507)
  other v1: 4877,3830
LED_BLUE_0: D14.2 U5.3 | length 1734.9
  Top Layer w8: v1(3967,3568) 3987,3568 4087,3468 4621,3468 v1(4640,3449) ; v1@4777.53,2841.53 D14.2@4777.53,2869
  Bottom Layer w8: U5.3@3702.43,3411.53 3729.02,3411.53 3885.49,3568 v1@3960.51,3568 ; v1@4640,3438 4640,3324 4777,3187 4777,2837.05 v1@4779.53,2834.53 ; v1@4778,2836.05 v1(4778,2837)
LED_BLUE_1: D15.2 U5.4 | length 1670.2
  Top Layer w8: v1(3931.5,3538.5) 3993.38,3538.5 4079.88,3452 4585.63,3452 4644.63,3393 4881.3,3393 5000,3274.3 5000,3075.96 D15.2@4997.12,3073.08
  Bottom Layer w8: U5.4@3702.43,3391.84 3731.96,3391.84 3878.12,3538 3925.65,3538 3926.15,3538.5 v1(3931.5,3538.5)
LED_BLUE_2: D16.2 U5.5 | length 1298.2
  Top Layer w8: v1@3968,3508 4001.25,3508 4073.25,3436 4579,3436 4638,3377 4839.47,3377 D16.2@4873.11,3343.36 D16.2@4872,3341
  Bottom Layer w8: U5.5@3702.43,3372.16 3734.9,3372.16 3870.75,3508 3918.28,3508 3918.78,3508.5 3967.5,3508.5 v1(3968,3509)
LED_BLUE_3: D17.2 U5.6 | length 994.6
  Top Layer w8: v1@3910,3479.5 4007.13,3479.5 4066.63,3420 4473,3420 4572,3321 D17.2@4572,3318
  Bottom Layer w8: U5.6@3702.43,3352.47 3737.84,3352.47 3864.37,3479 v1@3914,3479
  other v1: 3912,3478
LED_BLUE_4: D18.2 U5.8 | length 1284.4
  Top Layer w8: v1@4220,3378 4246,3404 4466.37,3404 4521,3349.37 v1(4521,3264) ; v1@4483,3007 D18.2@4521.12,3018.92
  Bottom Layer w8: U5.8@3702.43,3313.1 3826.1,3313.1 3896.22,3383.22 3896.22,3383 4091.72,3383 4101.72,3373 v1(4220,3373) ; v1(4483,3006) 4521,3044 v1(4521,3264)
LED_GREEN_0: D19.2 U5.9 | length 724.5
  Top Layer w8: v1@3706,3136 3706,2975 3839,2842 4015,2842 4025,2852 D19.2@4025,2874
  Bottom Layer w8: U5.9@3672.9,3283.57 3672.9,3169.1 3706,3136 v1(3706,3134)
LED_GREEN_1: D20.2 U5.10 | length 918.8
  Top Layer w8: v1@3653,3045 3653,3122.42 3641.21,3134.21 v1(3653.21,3134.21) ; D20.2@4242.12,3079.08 4242.12,3118.88 v1@4246,3119
  Bottom Layer w8: v1@3653,3045 4027,3045 4101,3119 v1@4242,3119 ; v1(3653.21,3134.21) U5.10@3653.21,3283.57
  other v1: 3653,3044 4240,3118
LED_GREEN_2: D21.2 U5.11 | length 851.9
  Top Layer w8: v1@4083,3343 4083,3358 4084,3359 v1@4083,3359 ; v1@4084,3351 4112,3351 4116.64,3346.36 D21.2@4123.11,3346.36
  Bottom Layer w8: U5.11@3633.53,3283.57 3633.53,3259.32 3623.71,3249.5 3623.71,3112.29 3639,3097 3767,3097 3858,3188 3999,3188 4083,3272 v1@4083,3352
  other v1: 4083,3350
LED_GREEN_3: D22.2 U5.14 | length 374.7
  Top Layer w8: v1@3589,3205 v1(3589,3207) ; v1@3589,3206 3595,3200 3718,3200 3809.23,3291.23 3809.23,3291.77 D22.2@3829.11,3311.64
  Bottom Layer w8: U5.14@3574.47,3283.57 3574.47,3220.53 v1@3589,3206
LED_GREEN_4: D23.2 U5.15 | length 510.9
  Top Layer w8: D23.2@3771,3021 v1(3781,2990)
  Bottom Layer w8: U5.15@3554.79,3283.57 3554.79,3154.84 3589,3120.63 3589,3028 3628,2989 3780,2989 v1(3781,2990)
LED_HEARTBEAT: R8.1 U1.73 | length 2475.1
  Top Layer w8: v1@4403,3758 4431,3730 v1@4914,3730
  Bottom Layer w8: v1@4405,3756 4405,3700.63 4369,3664.63 4369,3008.12 4491.62,2885.5 4492.85,2885.5 4547,2831.35 4547,2623 4509,2585 R8.1@4479.53,2585 ; R8.1@4479,2586 R8.1@4485,2586 ; v1@4915,3730 v1(4916,3730) 4966,3730 5128,3892 5128,3996.24 5127,3997.24 5127,4056.75 5059.6,4124.15 U1.73@4959.23,4124.15
  other v1: 4404,3758
LED_IR_BEACON: J6.16 Q1.1 R32.2 | length 1351.1
  Bottom Layer w8: Q1.1@4012.43,4038.4 R32.2@4073.6,4038.4 ; J6.16@4050,5189.98 4050,5117 4024,5091 4024,4562.63 3992,4530.63 3992,4295.65 4058.65,4229 4112.37,4229 4131,4210.37 4131,4105 4083,4057 R32.2@4083,4033
LED_MSP430: D29.2 U5.22 | length 3435.1
  Top Layer w8: v1@3372,3479 v1@3374,3479 ; v1(3374,3480) 3281,3480 3255,3506 3255,3595 3294,3634 3808,3634 3867,3575 3867,3467 3931,3403 4147,3403 4238,3312 v1(4476,3312) ; D29.2@4393.53,2684 4423,2684 4470,2637 4470,2452 4492,2430 4523,2430 4682,2589 v1(4815,2589)
  Bottom Layer w8: v1@3373,3477 3373,3459 3405,3427 3405.25,3427 3420.73,3411.53 U5.22@3505.57,3411.53 ; v1@4473,3308 4475,3306 4417,3248 4417,3028 4511.5,2933.5 4512.73,2933.5 4668,2778.23 4668,2736 v1(4815,2589)
LED_RED_0: D24.2 U5.16 | length 659.2
  Top Layer w8: D24.2@3277.53,2876 3408,2876 3409,2866 v1@3409,2875
  Bottom Layer w8: v1(3411,2875) 3411,2866 3573,3028 3573,3114 3535.1,3151.9 3535.1,3209.76 3535.5,3210.15 3535.5,3283.18 U5.16@3535.1,3283.57
LED_RED_1: D25.2 U5.17 | length 299.5
  Top Layer w8: D25.2@3493,3077 3508,3092 v1(3508,3115)
  Bottom Layer w8: U5.17@3505.57,3313.1 3472,3313.1 3472,3293 3519.5,3245.5 3519.5,3216.78 3510,3207.28 v1@3510,3115
LED_RED_2: D26.2 U5.19 | length 219.6
  Top Layer w8: v1@3336,3356.47 3340.47,3352 3364.47,3352 D26.2@3373.11,3343.36
  Bottom Layer w8: v1(3328.53,3352.47) U5.19@3505.57,3352.47
LED_RED_3: D27.2 U5.20 | length 507.4
  Top Layer w8: D27.2@3079.11,3308.64 3067,3320.76 3067,3343 3120,3396 v1@3326,3396
  Bottom Layer w8: v1@3328,3395 3392,3395 3414.84,3372.16 U5.20@3505.57,3372.16
  other v1: 3327,3396
LED_RED_4: D28.2 U5.21 | length 930.9
  Top Layer w8: D28.2@3021,2994 2992,2994 2974,3012 2974,3273 3133,3432 v1@3357,3432
  Bottom Layer w8: v1(3355,3431) 3378.37,3431 3398.37,3411 3398.63,3411 3417.63,3392 U5.21@3505.42,3392
LEFT: R45.1 R49.1 U8.46 | length 124.6
  Bottom Layer w8: R49.1@3179,4608.53 R45.1@3179,4646 ; R45.1@3183.53,4649 3184,4649 3184,4676 3189.1,4681.1 U8.46@3189.1,4733.57
LEFT_OUT: C44.1 R50.1 R54.2 | length 136.4
  Bottom Layer w8: R54.2@3134,4549.47 3134,4504 3145,4493 C44.1@3145,4489 ; C44.1@3146,4489 3173.47,4461.53 R50.1@3173.47,4429
LIGHT_B: R37.1 R41.1 U1.5 | length 2157.1
  Top Layer w8: v1(4214,2648) 4214,2466.63 4275,2405.63 R37.1@4275,2267
  Bottom Layer w8: v1(4214,2648) 4194,2668 4194,2880.75 4207.88,2894.63 4208,2894.63 4321,3007.63 4321,3702 4307,3716 4307,3804 4341,3838 4341,3929.28 4261,4009.28 4261,4135 4289.52,4163.52 U1.5@4362.77,4163.52 ; v1(4250,2432) R41.1@4250,2465.47 R41.1@4252,2463.47
LIGHT_FL: R35.1 R39.1 TP13.1 U1.2 | length 2980.3
  Top Layer w8: R35.1@2569,5020 TP13.1@2642.44,5014.05 ; v1(2650,4518) v1(2758,4518) ; v1(3428,4091) 3428,4093 3513,4093 3662,4242 4069,4242 4141,4170 4237,4170 4303,4104 v1@4303,4102
  Bottom Layer w8: R35.1@2570,5020 2570,5022 2632.5,5084.5 2690.5,5084.5 2718,5057 2718,4482.25 2899,4301.25 2899,4241.75 3049.75,4091 v1(3428,4091) ; R39.1@2650,4484.53 v1(2650,4518) ; 2723,4518 v1(2758,4518) ; v1@4299.46,4104.46 U1.2@4362.77,4104.46
  other v1: 4299,4104
LIGHT_FR: R36.1 R40.1 TP12.1 U1.1 | length 3256.3
  Top Layer w8: v1(4079.5,4829.5) 4080,4830 4148.28,4830 4154.78,4836.5 4179.22,4836.5 4184.72,4831 4328.63,4831 4407.13,4752.5 4533.87,4752.5 4596.37,4815 4731.37,4815 4833.37,4917 5054,4917 5116,4855 5158,4855 v1@5171,4842 ; v1@4164,4042 4164,4039 4186,4061 v1(4299,4061) ; v1@5194,5026 5194,4986 5212,4968 5378,4968 R36.1@5430,5020 ; R36.1@5429,5019 5513,4935 TP12.1@5626,4935
  Bottom Layer w8: v1(4079.5,4829.5) v1@4080,4829 ; v1@4080,4837 v1@4080,4829 ; v1@4164,4042 4147,4059 4147,4217 4117,4247 4063.28,4247 4012,4298.28 4012,4458 4057,4503 4057,4716.28 4056.5,4716.78 4056.5,4805.5 v1@4080,4829 ; v1@4297,4061 4310.5,4074.5 4311.22,4074.5 4321.5,4084.78 U1.1@4362.77,4084.78 ; v1(5171,4841) 5171,4941 5148.78,4963.22 5148.78,4963.5 5123,4989.28 5123,5014 5134,5025 v1@5195,5025 ; R40.1@5398,5087 5398,5052 R36.1@5430,5020
  other v1: 4165,4048 5195,5024
MICN: U8.2
MICP: U8.1
MOT0_PWMA: J6.4 TP14.1 U1.47 | length 1875.9
  Top Layer w8: v1@3751,4618 3755,4614 4758,4614 v1@4836.5,4535.5 ; TP14.1@4432,4515 4432,4614
  Bottom Layer w8: v1@3750,4618 J6.4@3750,5189.98 ; v1@4838.17,4534 U1.47@4838.17,4619.23
  other v1: 4838,4535 3749,4616
MOT0_PWMB: J6.6 TP15.1 U1.18 | length 1696
  Top Layer w8: v1@3782,4947 4107.37,4947 4117.37,4957 4196.35,4957 4212.35,4941 v1@4259,4941 ; v1(4160,4441) 4187.5,4413.5 4228.22,4413.5 4242.22,4399.5 v1(4286,4399.5) 4392.5,4399.5 TP15.1@4433,4440
  Bottom Layer w8: v1@3790.5,4938.5 3766,4963 3766,5035 3800,5069 J6.6@3800,5189.98 ; v1(4160,4441) 4160,4524 4265,4629 v1@4265,4938 ; v1(4286,4399.5) 4286.5,4400 4299.63,4400 4319.05,4419.43 U1.18@4362.77,4419.43
  other v1: 4265,4942 3780,4947
MOT1_PWMA: J6.8 U1.66 | length 2033.5
  Top Layer w8: v1@3837,4335 3849,4335 3855,4341 4153.25,4341 4183.75,4310.5 4614.5,4310.5 4631.5,4327.5 4773.5,4327.5 4840,4261 4844,4265 v1(4850,4265)
  Bottom Layer w8: v1@3836,4345 3836,4411 3843,4418 3843,5099 3850,5106 J6.8@3850,5189.98 ; v1@4841.5,4263.5 4957.67,4263.5 U1.66@4959.23,4261.94
  other v1: 3836,4336